# Altium PCB PCB1.PcbDoc
Units mil, origin at the board's own origin, x right, y up, seen from the top; angles counter-clockwise.
Board outline 2500 x 2125 mil, 2 copper layers (Top Layer, Bottom Layer); 26 components, 13 nets, 62 pads, 2 vias.
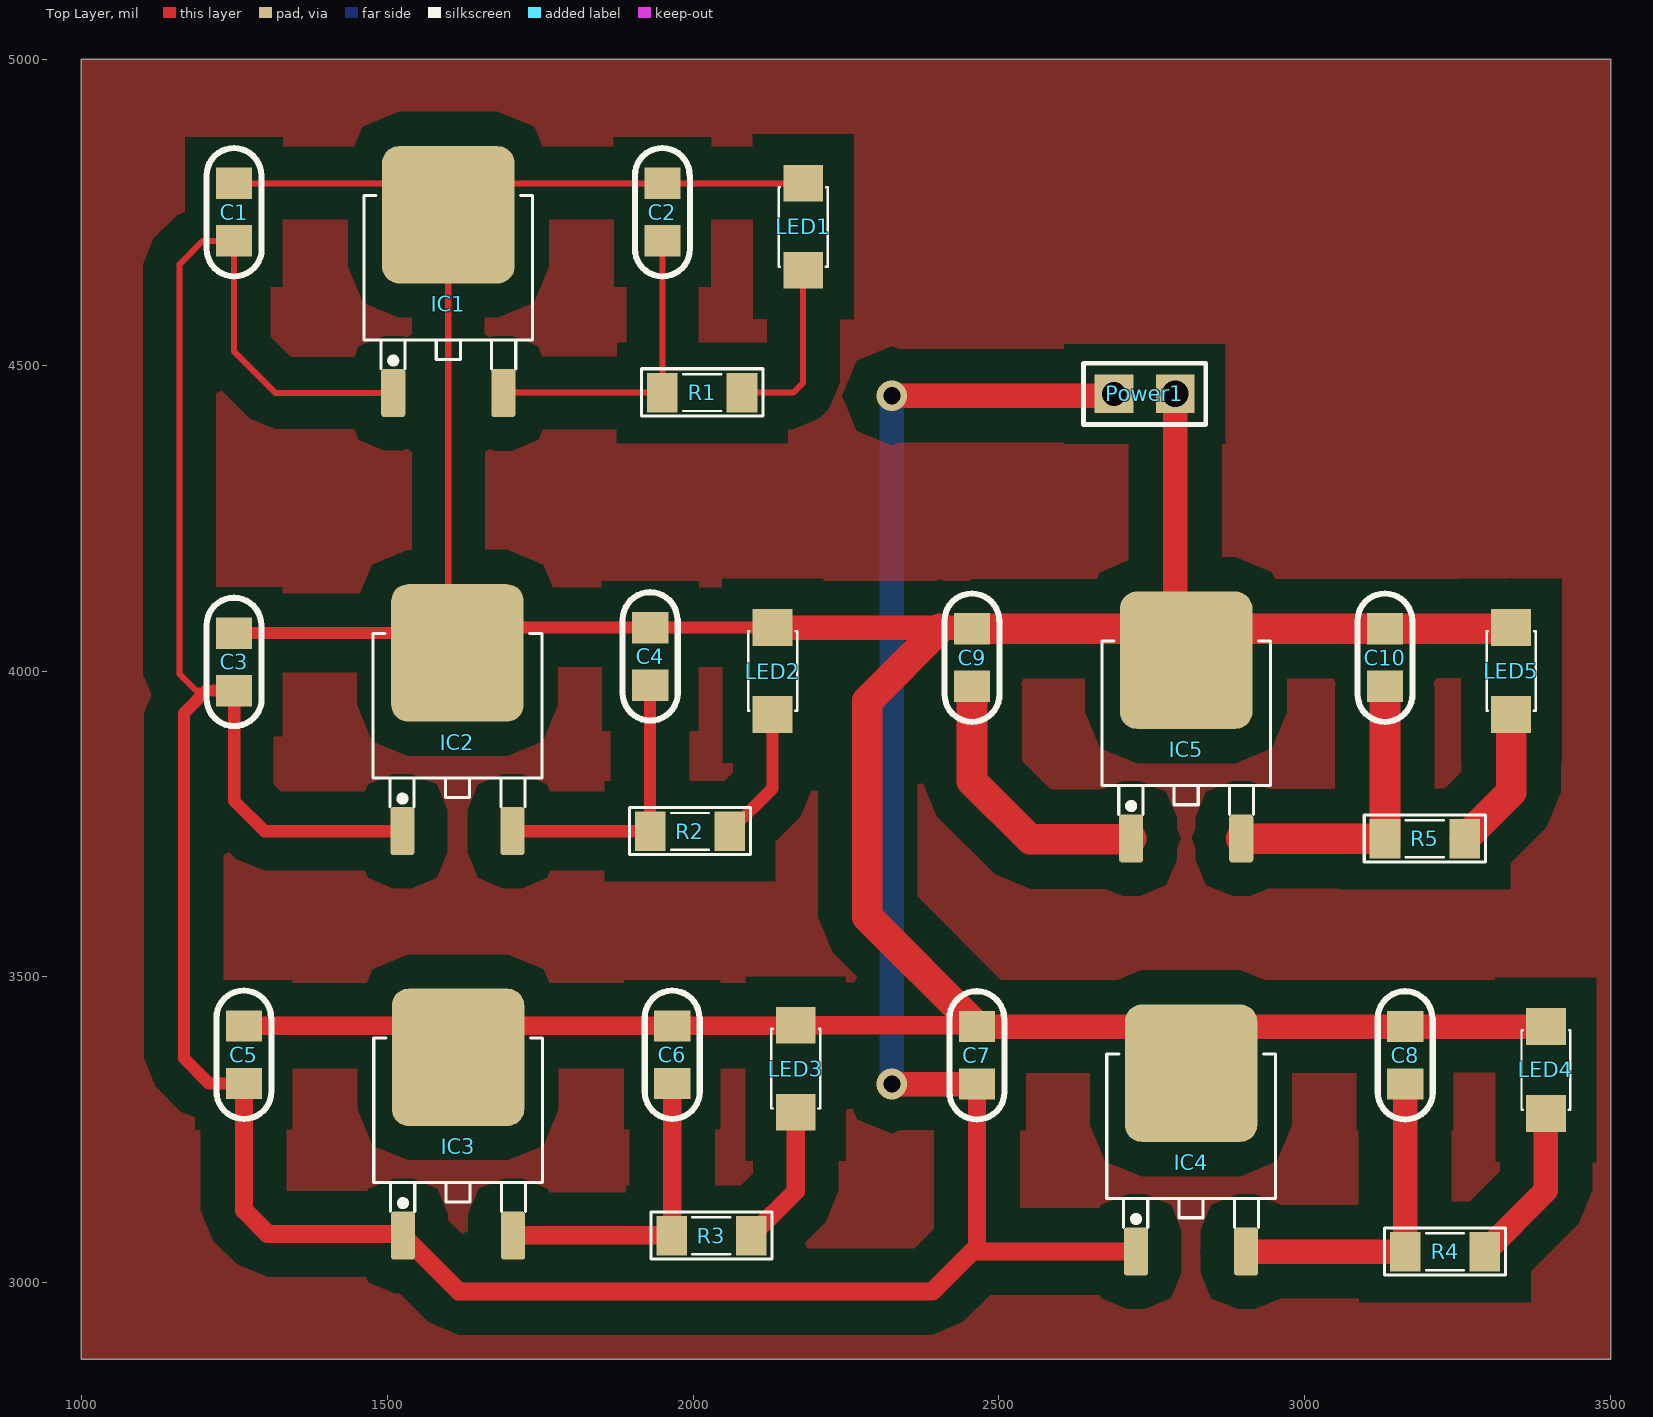
[diagram p0: Top Layer view]
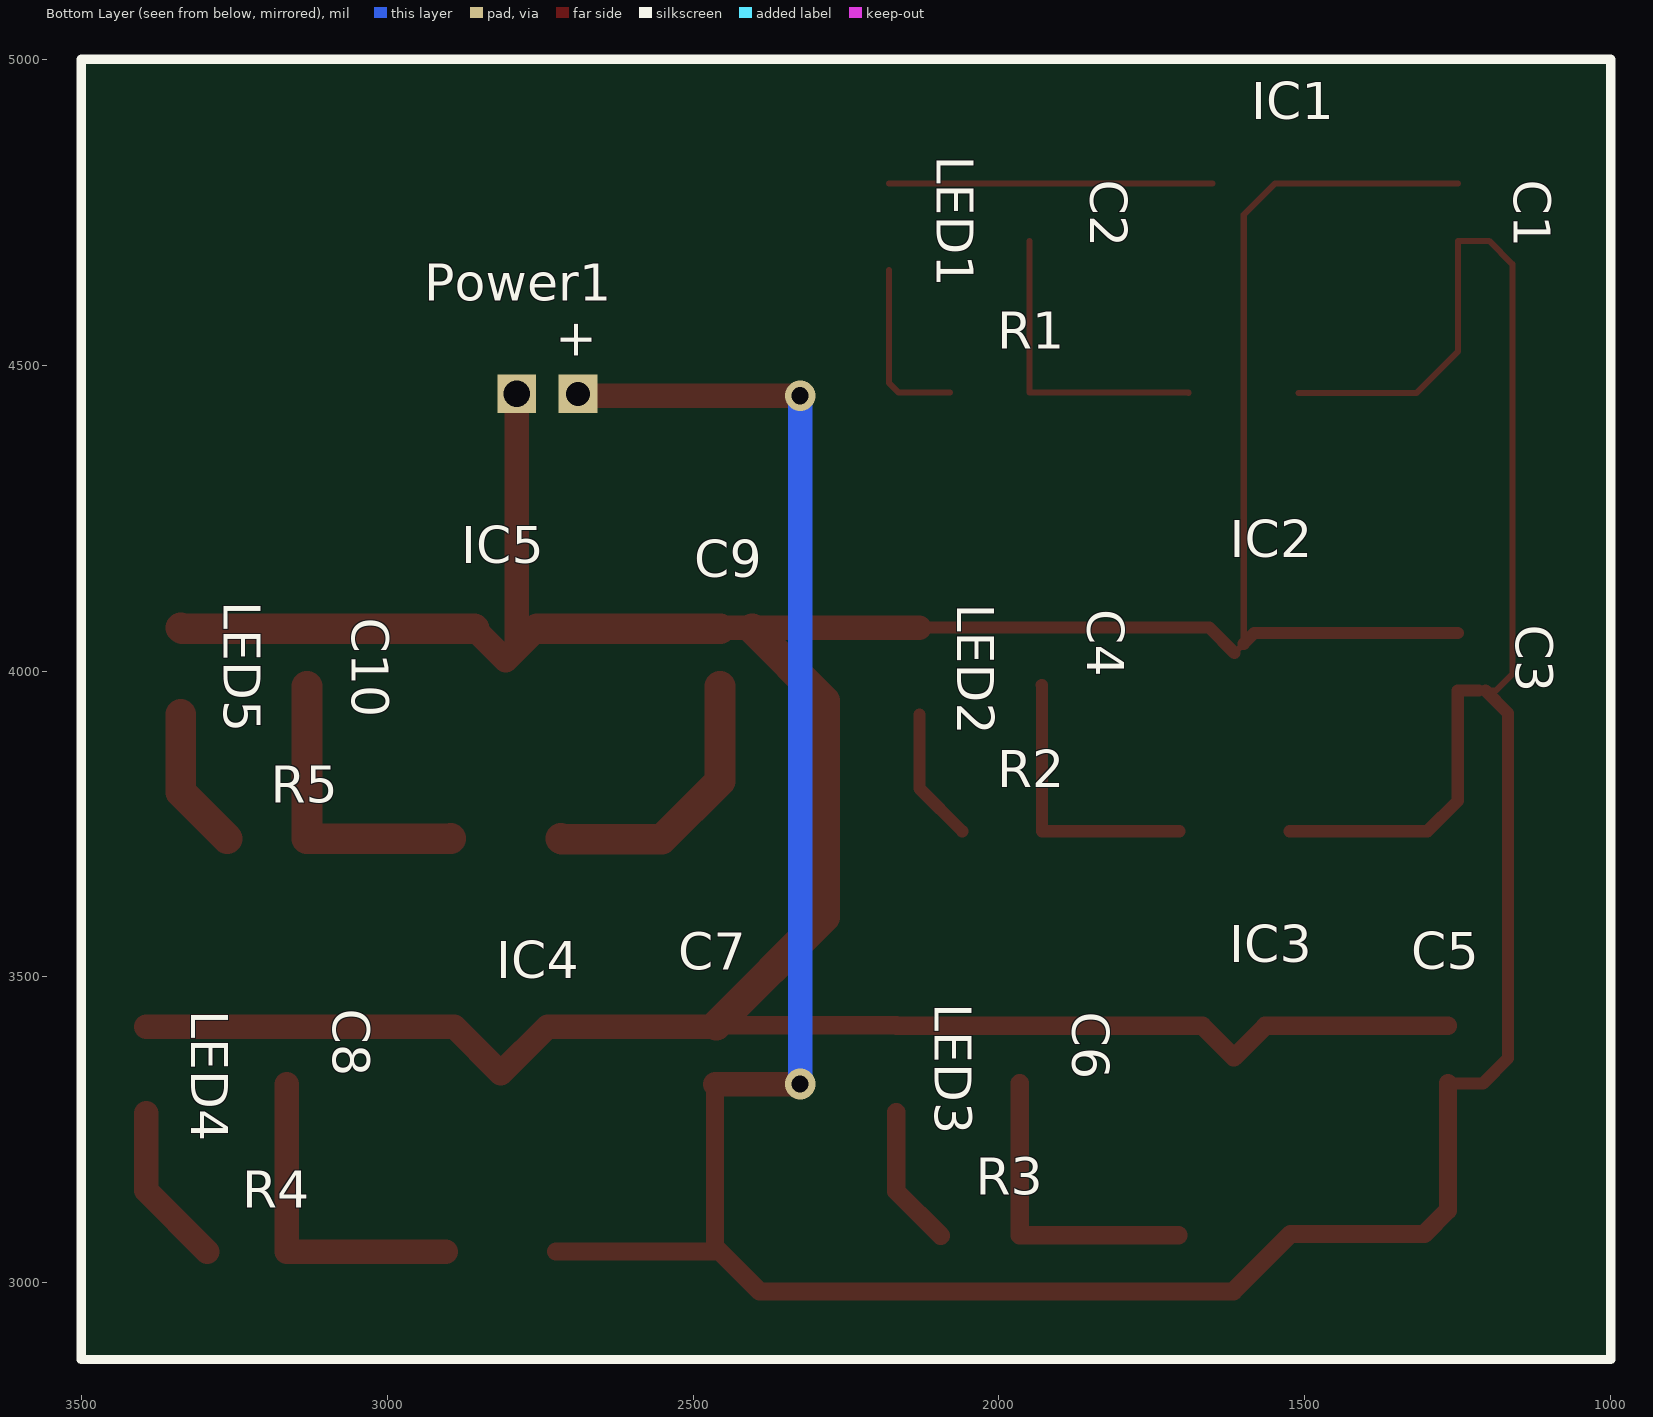
[diagram p1: Bottom Layer view, seen from below]
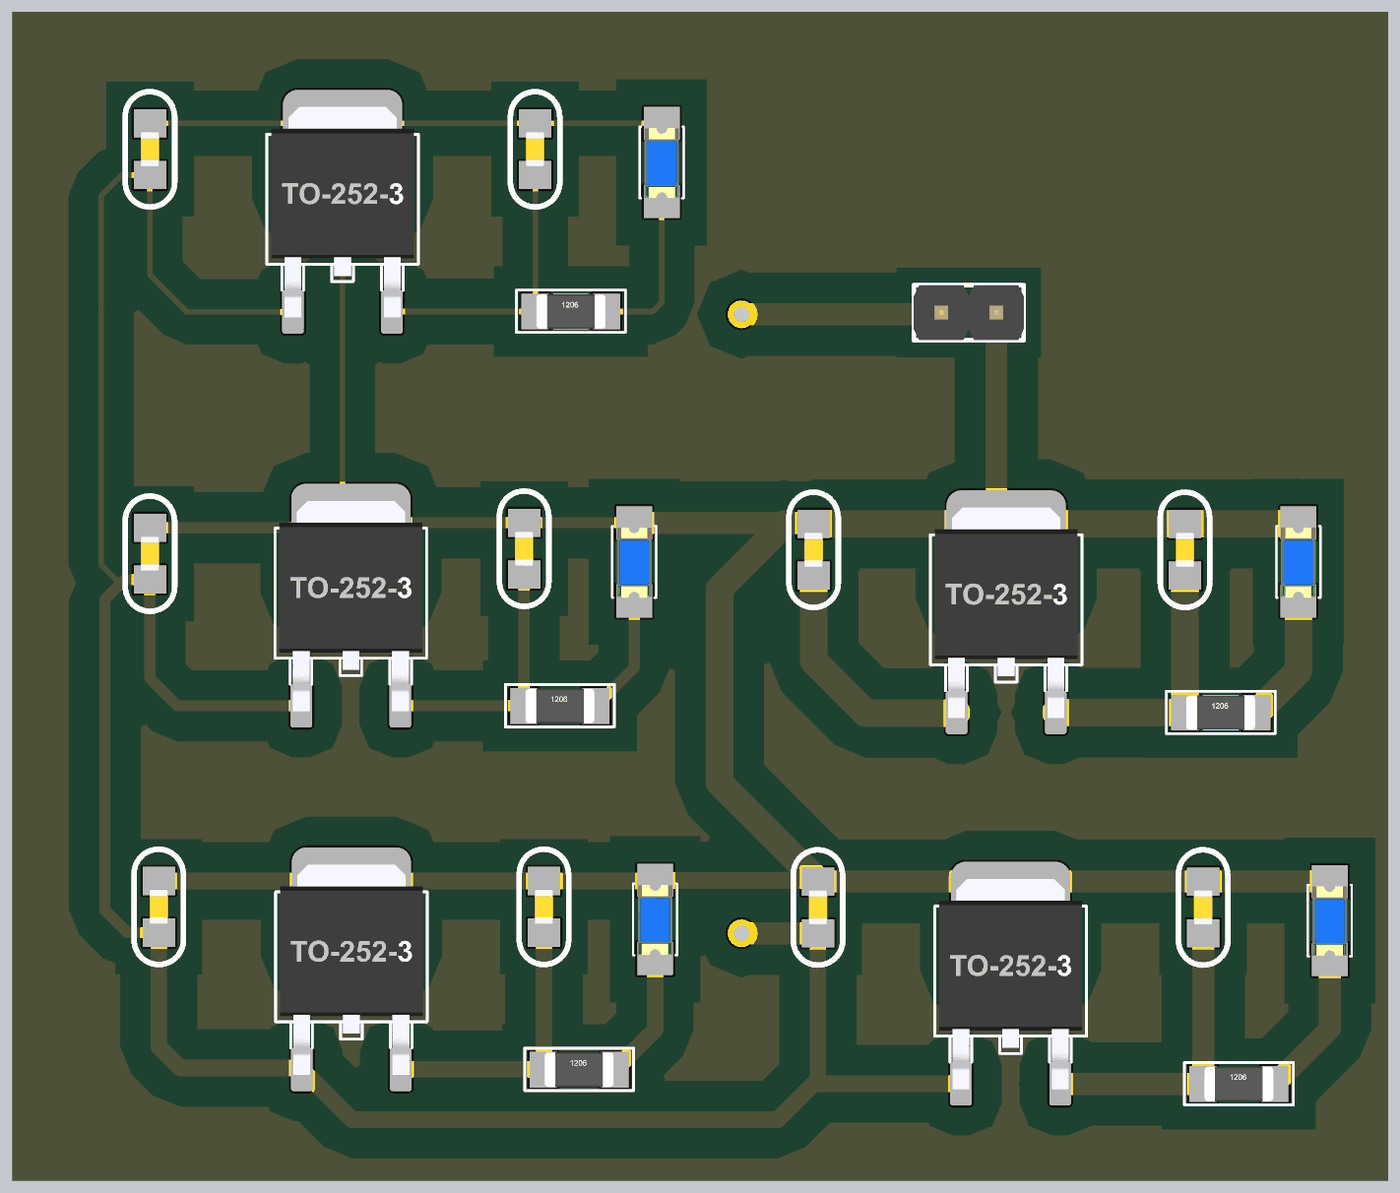
[diagram p2: 3D render of the assembled board from above, using the file's embedded part models]

## Layer stack, top to bottom
Top Solder: solder mask 0.4, Solder Resist, Dk 3.5
Top Layer: signal copper 1.4
Dielectric 1: dielectric 12.6, FR-4, Dk 4.8
Bottom Layer: signal copper 1.4
Bottom Solder: solder mask 0.4, Solder Resist, Dk 3.5

## Board outline
1000,2875 1000,5000 3500,5000 3500,2875

## Design rules (kind name [scope] priority, off if disabled: settings)
Clearance Clearance_1 [InPolygon] p1: gap=50
Clearance [All] p2: gap=30
PolygonConnect [All] p1: connectstyle=Relief reliefconductorwidth=10 reliefentries=4 polygonreliefangle="90 Angle" airgapwidth=10
RoutingVias [All] p1: holewidth=28 width=50 viastyle="Through Hole" minholewidth=28 minwidth=50 maxholewidth=28 maxwidth=50
SolderMaskExpansion [All] p1: expansion=4
Width [All] p1: maxlimit=50 minlimit=10 preferedwidth=30
30 further rules are at their usual default settings.

## Components (designator, comment, footprint, x,y, rotation, side; value= is the part's Value field where it differs from the comment)
C1 "Cap Non-pol" C-NP-0805 1250,4750 r90 top
C2 "Cap Non-pol" C-NP-0805 1950,4750 r90 top
C3 "Cap Non-pol" C-NP-0805 1250,4015 r90 top
C4 "Cap Non-pol" C-NP-0805 1930,4024 r90 top
C5 "Cap Non-pol" C-NP-0805 1266,3373 r90 top
C6 "Cap Non-pol" C-NP-0805 1966,3373 r90 top
C7 "Cap Non-pol" C-NP-0805 2464,3372 r90 top
C8 "Cap Non-pol" C-NP-0805 3164,3372 r90 top
C9 "Cap Non-pol" C-NP-0805 2456,4022 r90 top
C10 "Cap Non-pol" C-NP-0805 3131,4022 r90 top
IC1 "LM78xx" TO252-123 1600,4600 r0 top
IC2 "LM78xx" TO252-123 1615,3884 r0 top
IC3 "LM78xx" TO252-123 1616,3223 r0 top
IC4 "LM78xx" TO252-123 2814,3197 r0 top
IC5 "LM78xx" TO252-123 2806,3872 r0 top
LED1 "LED" LED-1206-Blue 2180,4655 r90 top
LED2 "LED" LED-1206-Blue 2130,3929 r90 top
LED3 "LED" LED-1206-Blue 2168,3279 r90 top
LED4 "LED" LED-1206-Blue 3394,3277 r90 top
LED5 "LED" LED-1206-Blue 3337,3929 r90 top
Power1 "JP2" JP2-D1T 2788,4453 r180 top
R1 "300R" RES-SMD-1206 2015,4455 r0 top
R2 "300R" RES-SMD-1206 1995,3738 r0 top
R3 "300R" RES-SMD-1206 2030,3077 r0 top
R4 "300R" RES-SMD-1206 3229,3051 r0 top
R5 "300R" RES-SMD-1206 3196,3726 r0 top

## Footprints (in the part's own frame and the unit in brackets; to place one, negate y for a bottom-side part, rotate by r counter-clockwise, add the part's x,y. Pads: shape width x height; smd on the part's side, far side on the other; paste and mask are expansions set on the pad)
C-NP-0805 [mm] "Chip Capacitor; Non-polarized; Body 2.0 x 1.3 mm (LxW typ) [2012]"
  rect 1.3x1.5 smd: 1(-1.194,0) 2(1.194,0)
  silkscreen extent -2.67,-1.14 2.66,1.14, body extent -0.8,-0.43 0.8,0.43, height 0.79
JP2-D1T [mm] "2 pins, 1 row, straight, gold plating"
  rect 1.6x1.6 hole 1.1: 1(0,0)
  rect 1.6x1.6 hole 1: 2(2.54,0)
  silkscreen extent -1.27,-1.27 3.81,1.27, body extent -1.27,-1.27 3.81,1.27, height 8.54
LED-1206-Blue [mil] "Compoment SMD 120x60mil"
  rect 60x65 smd: 1(0,0) 2(142,0)
  silkscreen extent 6,-40 136,40, body extent 7,-31 133,32, height 43
RES-SMD-1206 [mil]
  rect 50x65 smd: 1(-65,0) 2(65,0)
  silkscreen extent -99,-38 99,39, body extent -63,-31 63,32, height 40
TO252-123 [mm]
  round 0.5 on Mech15: 0(0,0)
  rrect25% 1x2 smd: 1(-2.285,-3.7) 3(2.285,-3.7)
  rrect25% 5.5x5.7 smd: 2(0,3.7)
  silkscreen extent -3.5,-2.7 3.5,4.5, body extent -3.3,-3.95 3.3,5.76, height 2.31

## Part data
C1 C2 C3 C4 C5 C6 C7 C8 C9 C10: "Non-polarized Capacitor"
IC1 IC2 IC3 IC4 IC5: "Positive Voltage Regulator"
LED1 LED2 LED3 LED4 LED5: library part "LED SMD"
Power1: "WR-PHD 2.54 mm Angled Socket Header"
R1 R2 R3 R4 R5: library part Res-SMD, "Resistor"

## Via types
v1: diameter 50, hole 28, Top Layer to Bottom Layer, 2 vias

## Nets (pads, with @x,y where several pads share a name; then routed paths per layer and width w, separated by ;. In a path a pad name is that pad's centre, name@x,y a point inside that pad or via, vN(x,y) a via of type N, cw(c..) or ccw(c..) an arc to the next point about the centre after c; other vN are vias at no path point)
GND: C1.2 C2.2 C3.2 C4.2 C5.2 C6.2 C7.2 C8.2 C9.2 C10.2 IC1.2 IC2.2 IC3.2 IC4.2 IC5.2 LED1.2 LED2.2 LED3.2 LED4.2 LED5.2 Power1.1 | length 7185.1
  Top Layer w10: C1.2 1548.67,4797 IC1.2 1600,4044.67 IC2.2 ; IC1.2@1651.33,4797 C2.2 LED1.2
  Top Layer w20: C3.2 1582.67,4062 IC2.2@1600,4044.67 ; IC2.2 1656.33,4071 C4.2 LED2.2
  Top Layer w30: C5.2 1564.67,3420 IC3.2 1667.33,3420 C6.2 2167,3420 LED3.2 2462,3421 C7.2
  Top Layer w40: LED2.2 2454,4071 C9.2 ; C7.2 2737.67,3419 IC4.2 2890.33,3419 C8.2 LED4.2 ; IC5.2@2754.67,4069 IC5.2@2788,4035.67 ; Power1.1 IC5.2@2788,4035.67 ; IC5.2@2857.33,4069 IC5.2 IC5.2@2788,4035.67
  Top Layer w50: 2403,4069 2285,3951 2285,3598 C7.2@2462,3421 ; C9.2 IC5.2@2754.67,4069 ; IC5.2@2857.33,4069 C10.2 3335,4069 LED5.2
NetC2_1: C2.1 IC1.3 R1.1 | length 508.3
  Top Layer w10: IC1.3 1690.63,4455 R1.1 C2.1
NetC4_1: C4.1 IC2.3 R2.1 | length 463.5
  Top Layer w20: IC2.3 1929.67,3738.33 1929.67,3976.67 C4.1
NetC6_1: C6.1 IC3.3 R3.1 | length 507.4
  Top Layer w30: IC3.3@1706.63,3078 1966,3078 C6.1
NetC8_1: C8.1 IC4.3 R4.1 | length 533.7
  Top Layer w40: IC4.3@2904.29,3051 R4.1 C8.1
NetC9_1: C9.1 IC5.1 | length 454.9
  Top Layer w50: C9.1 2456,3820 2551,3725 2714.71,3725 IC5.1
NetC10_1: C10.1 IC5.3 R5.1 | length 484.2
  Top Layer w50: IC5.3 2896.29,3726 R5.1 C10.1
NetLED1_1: LED1.1 R1.2 | length 290.6
  Top Layer w10: R1.2 2164,4455 2180,4471 LED1.1
NetLED2_1: LED2.1 R2.2 | length 220
  Top Layer w20: R2.2 2130,3808 LED2.1
NetLED3_1: LED3.1 R3.2 | length 232.2
  Top Layer w30: R3.2 2168,3150 LED3.1
NetLED4_1: LED4.1 R4.2 | length 267.4
  Top Layer w40: R4.2 3394,3151 LED4.1
NetLED5_1: LED5.1 R5.2 | length 234.5
  Top Layer w50: R5.2 3337,3802 LED5.1
VCC: C1.1 C3.1 C5.1 C7.1 IC1.1 IC2.1 IC3.1 IC4.1 Power1.2 | length 6192.2
  Top Layer w10: 1205,3968 1188,3968 1161,3995 1161,4665 1199,4703 C1.1 1250,4522 1317.67,4454.33 IC1.1
  Top Layer w20: 1205,3968 1168,3931 1168,3367 1209,3326 C5.1 ; 1216,3968 C3.1 1250,3788 1299.67,3738.33 IC2.1
  Top Layer w30: C5.1 1266,3119 1305,3080 1523.37,3080 IC3.1 1617.37,2986 2391,2986 2464,3059 ; C7.1 2464,3059 ; IC4.1 2464,3051.33 2464,3059
  Top Layer w40: v1(2325,3325) C7.1 ; v1(2325,4450) 2685,4450 Power1.2
  Bottom Layer w40: v1(2325,3325) v1(2325,4450)
pads on no net: IC1.0 IC2.0 IC3.0 IC4.0 IC5.0

## Polygon pours and split planes (outlines as drawn)
no net on Top Layer "Mechanical 1-No Net" (solid, pour order 4): 1000,5000 3500,5000 3500,2875 1000,2875 1000,5000

## Silkscreen, mask and mechanical layers (free items; w line width, h text height)
Bottom Overlay:
  the board outline again, w15
  text "+" at 2716,4576 h60 r90